# EAGLE board linkmp3 (EAGLE 5.05)
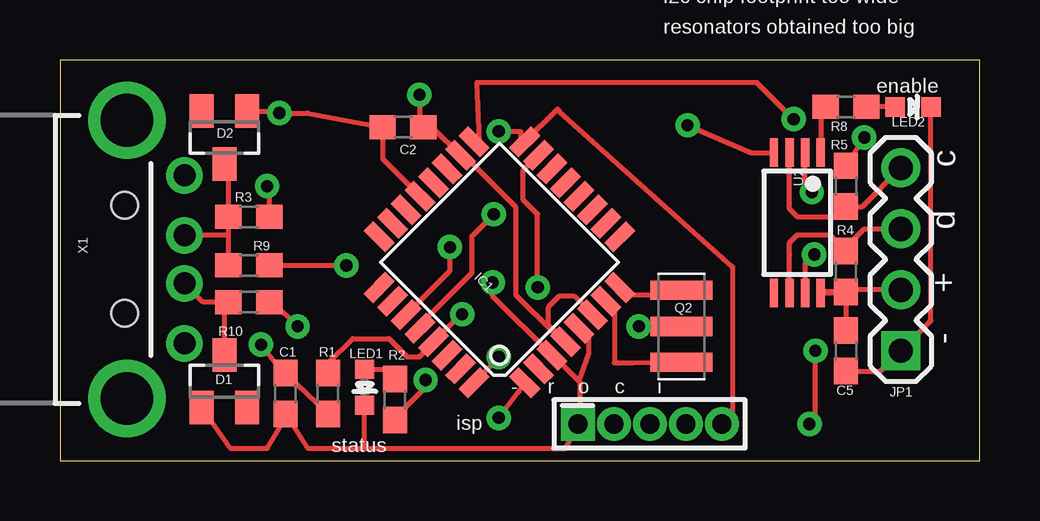
[diagram p0: board, top side]
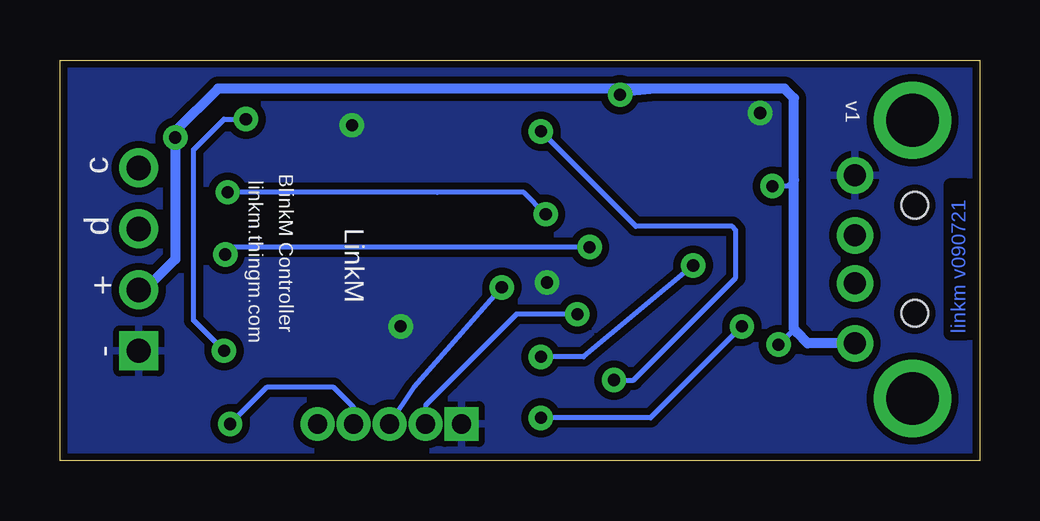
[diagram p1: board, bottom side, seen from below]

Size 38.33 x 16.69 mm. Coordinates in mm from the lower left corner, seen from the top.
Outline: 0,0 38.33,0 38.33,16.69 0,16.69 0,0
Copper layers (1*16): Top 0.035mm / dielectric 1.5mm / Bottom 0.035mm
Design rules "SparkFun": minimum track width 8mil, minimum drill 20mil, track to track 8mil, track to pad 8mil, pad to pad 8mil, via to via 8mil, smd to smd 8mil, copper to edge 10mil, drill to drill 8mil, minimum pad ring 12mil, minimum via ring 10mil, stop-mask expansion 4mil, vias tented up to drill 25mil, thermal gap 10mil

## Footprints (pad centres in the part's own frame; a part is rotated, then mirrored left to right if it is on the bottom)
C0603 = smd 1.1 x 1: 1 -0.85,0; 2 0.85,0
SOT23 = smd 1 x 1.4: 1 -0.95,-1.1; 2 0.95,-1.1; 3 0,1.1
TQFP32-08 = smd 1.27 x 0.559: 1 -4.293,2.8; 2 -4.293,2; 3 -4.293,1.2; 4 -4.293,0.4; 5 -4.293,-0.4; 6 -4.293,-1.2; 7 -4.293,-2; 8 -4.293,-2.8; 17 4.293,-2.8; 18 4.293,-2; 19 4.293,-1.2; 20 4.293,-0.4; 21 4.293,0.4; 22 4.293,1.2; 23 4.293,2; 24 4.293,2.8 | smd 0.559 x 1.27: 9 -2.8,-4.293; 10 -2,-4.293; 11 -1.2,-4.293; 12 -0.4,-4.293; 13 0.4,-4.293; 14 1.2,-4.293; 15 2,-4.293; 16 2.8,-4.293; 25 2.8,4.293; 26 2,4.293; 27 1.2,4.293; 28 0.4,4.293; 29 -0.4,4.293; 30 -1.2,4.293; 31 -2,4.293; 32 -2.8,4.293
1X04 = drill 1.016 square: 1 0,0 | drill 1.016 round: 2 2.54,0; 3 5.08,0; 4 7.62,0
LED-0603 = smd 0.8 x 0.8: A 0,-0.75; C 0,0.75
CSTCR6M = smd 0.8 x 2.6: 1 -1.5,0; 2 0,0; 3 1.5,0
0603 = smd 1.1 x 1: 1 -0.85,0; 2 0.85,0
TSSOP8 = smd 1.2 x 0.35: 1 -2.925,0.975; 2 -2.925,0.325; 3 -2.925,-0.325; 4 -2.925,-0.975; 5 2.925,-0.975; 6 2.925,-0.325; 7 2.925,0.325; 8 2.925,0.975
AVR_MINI_PROG_5PIN = drill 0.8 pad 1.27 square: 1 0,0 | drill 0.8 pad 1.27 round: 2 1.5,0; 3 3,0; 4 4.5,0; 5 6,0
USB-A-H = drill 0.914 round: D+ 2.4,1; D- 2.4,-1; GND 2.4,3.5; VBUS 2.4,-3.5 | drill 2.2 round: GND@1 0,5.8; GND@2 0,-5.8 | hole 1.1: -0.1,2.25; -0.1,-2.25

## Placement (x,y rotation side)
C1  0.1uF  [C0603]  9.4,2.79 270 top
C2  10uF  [C0603]  14.3,13.9 180 top
C5  .01uF  [C0603]  32.77,4.57 270 top
D1  3.6v  [SOT23]  6.86,3.3 0 top
D2  3.6v  [SOT23]  6.86,13.46 180 top
IC1  MEGA8-AI  [TQFP32-08]  18.32,8.26 135 top
JP1  blinkm  [1X04]  35.05,4.57 90 top
LED1  status  [LED-0603]  12.7,3.05 180 top
LED2  enable  [LED-0603]  35.56,14.73 270 top
Q2  CSTCR6M00G53Z  [CSTCR6M]  25.91,5.59 90 top
R1  10k  [0603]  11.18,2.79 90 top
R2  1k  [0603]  13.97,2.54 90 top
R3  1.5k  [0603]  7.87,10.16 180 top
R4  4.7k  [0603]  32.77,7.87 90 top
R5  4.7k  [0603]  32.77,11.43 270 top
R8  1k  [0603]  32.77,14.73 0 top
R9  68  [0603]  7.87,8.13 180 top
R10  68  [0603]  7.87,6.6 180 top
U2  PCA9513A  [TSSOP8]  30.73,9.91 270 top
U$2  AVR_MINIPROG_5PIN  [AVR_MINI_PROG_5PIN]  21.59,1.52 0 top
X1  USB-A-H  [USB-A-H]  2.79,8.38 0 top

## Library data of the parts
C1 C2 C5 = rcl
D1 D2 = diode
IC1 = atmel
JP1 LED1 LED2 R1-R5 R8-R10 X1 = SparkFun-20090330
Q2 = murata-filter
U2 U$2 = todstuff

## Nets
D+: D2.3 R3.2 R9.2 X1.D+
D-: D1.3 R10.2 X1.D-
ENABLE: R8.1 U2.1
GND: C1.2 C2.2 C5.2 D1.1 D2.1 IC1.3 IC1.5 IC1.21 JP1.1 LED1.C LED2.C Q2.2 U2.4 U$2.1 X1.GND
MISO: IC1.16 R2.1 U$2.5
MOSI: IC1.15 U$2.3
N$1: LED2.A R8.2
N$2: IC1.32 R9.1
N$6: IC1.7 Q2.1
N$7: IC1.8 Q2.3
N$8: LED1.A R2.2
N$9: IC1.1 R10.1
RESET: IC1.29 R1.2 U$2.2
SCK: IC1.17 U$2.4
SCL: IC1.28 U2.2
SCLBUS: JP1.4 R5.2 U2.3
SDA: IC1.27 U2.7
SDABUS: JP1.3 R4.2 U2.6
VCC: C1.1 C2.1 C5.1 IC1.4 IC1.6 IC1.18 JP1.2 R1.1 R3.1 R4.1 R5.1 U2.8 X1.VBUS

## Tracks (layer width: path | path; a pad name or v marks a point on that pad's centre or on a via)
D+
  Top 0.203: D2.3 7.02,12.2 R3.2 7.02,8.89 | 7.02,8.89 R9.2 7.02,8.89 | 7.02,8.89 7.02,9.13 | X1.D+ 7.02,9.38 7.02,8.89
D-
  Top 0.203: D1.3 6.86,6.44 R10.2 5.97,6.6 X1.D-
ENABLE
  Top 0.203: R8.1 31.96,14.73 31.71,14.48 U2.1
GND  (via drill 0.51)
  Top 0.203: LED2.C 36.31,5.83 JP1.1 34.2,3.72 C5.2 | IC1.21 13.45,12.57 13.45,13.21 C2.2 10.33,14.48 v9.14,14.48 8.81,14.56 D2.1 | 9.4,1.78 C1.2 | IC1.3 | 22.03,5.15 21.67,5.51 IC1.5 22.05,5.08 22.05,4.47 21.64,3.3 | D1.1 7.09,0.51 8.64,0.51 9.4,1.78 | 9.4,1.78 C1.2 | C1.2 10.33,0.51 12.7,0.51 | 12.7,0.51 21.08,0.51 U$2.1 21.69,1.73 21.69,3.25 21.64,3.3 | 21.64,3.3 21.03,3.91 IC1.3 | IC1.3 18.03,6.85 18.03,7.37 | U2.4 28.82,12.83 v26.16,13.97 | 12.7,0.51 LED1.C | v24.13,5.59 Q2.2 v24.13,5.59
  other vias: 18.03,7.42
  pour Bottom (isolate 0.305): 0,17.02 0,-1.02 40.39,-1.02 40.39,17.02
MISO  (via drill 0.51)
  Top 0.203: U$2.5 28.04,1.98 28.04,8.08 20.83,14.53 20.83,14.56 20.74,14.64 IC1.16 19.2,13.41 19.2,13.72 v18.29,13.72 | v15.24,3.35 15.24,3.05 14.02,1.83 R2.1
  Bottom 0.203: v18.29,13.72 14.33,9.75 10.31,9.75 10.16,9.6 10.16,7.62 14.43,3.35 v15.24,3.35
MOSI  (via drill 0.51)
  Top 0.203: v19.91,7.21 19.91,10.26 19.3,10.87 19.3,12.09 19.91,12.7 IC1.15
  Bottom 0.203: v19.91,7.21 23.57,3.04 U$2.3
N$1
  Top 0.203: LED2.A 34.54,14.73 33.53,14.73 R8.2
N$2  (via drill 0.51)
  Top 0.203: R9.1 v11.94,8.13 | v18.29,4.32 v18.28,4.31 IC1.32
  Bottom 0.203: 18.29,4.27 v18.29,4.32 16.51,4.32 v11.94,8.13
N$6
  Top 0.203: IC1.7 23.11,6.3 23.11,6.1 23.11,4.06 23.88,4.06 Q2.1
N$7
  Top 0.203: IC1.8 23.63,6.91 25.73,6.91 Q2.3
N$8
  Top 0.203: R2.2 13.56,3.8 LED1.A
N$9  (via drill 0.51)
  Top 0.203: R10.1 8.89,6.6 v9.91,5.59 | v18.29,1.78 19.12,2.86 IC1.1
  Bottom 0.203: v9.91,5.59 9.65,5.84 13.72,1.78 v18.29,1.78
RESET  (via drill 0.51)
  Top 0.203: v16.76,6.1 16.72,6.1 IC1.29 15.57,4.9 14.99,4.32 14.48,4.32 13.72,5.08 12.19,5.08 11.18,4.06 R1.2
  Bottom 0.203: U$2.2 23.09,2.31 22.1,3.3 19.3,6.1 18.29,6.1 18.03,6.1 v16.76,6.1
SCK  (via drill 0.51)
  Top 0.203: IC1.17 17.48,13.31 17.37,15.75 29.06,15.75 v30.58,14.22 | v31.5,4.57 31.5,1.78 v31.24,1.52
  Bottom 0.203: v30.58,14.22 31.5,14.22 32.77,12.95 32.77,7.32 32.77,5.84 v31.5,4.57 | U$2.4 26.09,2.21 26.92,3.05 29.72,3.05 v31.24,1.52
SCL  (via drill 0.51)
  Top 0.203: v18.09,10.26 17.17,9.35 17.17,7.82 15.34,5.99 IC1.28 | U2.2 31.06,11.46 v31.34,11.18
  Bottom 0.203: v31.34,11.18 31.24,11.18 22.61,11.18 19,11.18 v18.09,10.26
SCLBUS
  Top 0.203: JP1.4 33.44,10.58 R5.2 | U2.3 30.41,10.74 30.41,10.48 30.73,10.16 32.35,10.16 R5.2 | R5.2 32.6,10.41
SDA  (via drill 0.51)
  Top 0.203: IC1.27 16.26,7.9 v16.26,8.89 | U2.7 31.06,8.2 v31.45,8.59
  Bottom 0.203: v31.45,8.59 31.14,8.89 v16.26,8.89
SDABUS
  Top 0.203: U2.6 30.41,8.56 30.41,9.07 30.73,9.4 32.09,9.4 R4.2 32.42,8.89 32.77,8.89 33.53,9.65 JP1.3
VCC  (via drill 0.51)
  Top 0.203: JP1.2 33.02,7.11 R4.1 31.75,7.02 U2.8 | v33.53,13.46 R5.1 | U2.8 31.66,6.93 31.66,6.53 | v14.99,15.24 14.99,14.06 C2.1 15.52,13.9 IC1.18 16.87,12.7 19,10.57 19,6.91 20.52,5.38 20.58,5.44 | IC1.6 21.42,6.86 20.83,6.86 20.38,6.4 20.38,5.64 | 20.58,5.44 IC1.4 20.58,5.44 | 20.58,5.44 20.38,5.64 | R1.1 C1.1 9.31,3.64 v8.38,4.83 | 20.58,5.44 20.38,5.64 | R3.1 8.72,11.34 v8.64,11.43 | C5.1 32.77,6.98 U2.8
  Bottom 0.203: 12.39,15.49 v14.99,15.24 | v33.53,13.46 33.27,13.46 arc90 33.53,13.72 | v8.38,4.83 8.38,4.8 7.73,5.45 | v8.64,11.43 7.99,11.43 7.73,11.68
  Bottom 0.406: JP1.2 34.8,7.11 33.53,8.38 v33.53,13.46 33.53,13.72 31.75,15.49 28.96,15.49 15.24,15.49 12.39,15.49 8.13,15.49 7.73,15.1 7.73,11.68 7.73,5.45 7.62,5.33 7.17,4.88 X1.VBUS

## Text on the board
Bottom: linkm v090721
tPlace: i2c chip footprint too wide | resonators obtained too big | c | d | + | - | - | r | o | c | i | isp
bPlace: v1 | BlinkM Controller | linkm.thingm.com | c | LinkM | d | + | -